# Altium PCB Glucometer-InstrumentationCircuit-1Cara.PcbDoc
Units mm, origin at the board's own origin, x right, y up, seen from the top; angles counter-clockwise.
Board outline 34.45 x 28.5 mm, 2 copper layers (Top Layer, Bottom Layer); 11 components, 11 nets, 47 pads, 0 vias.
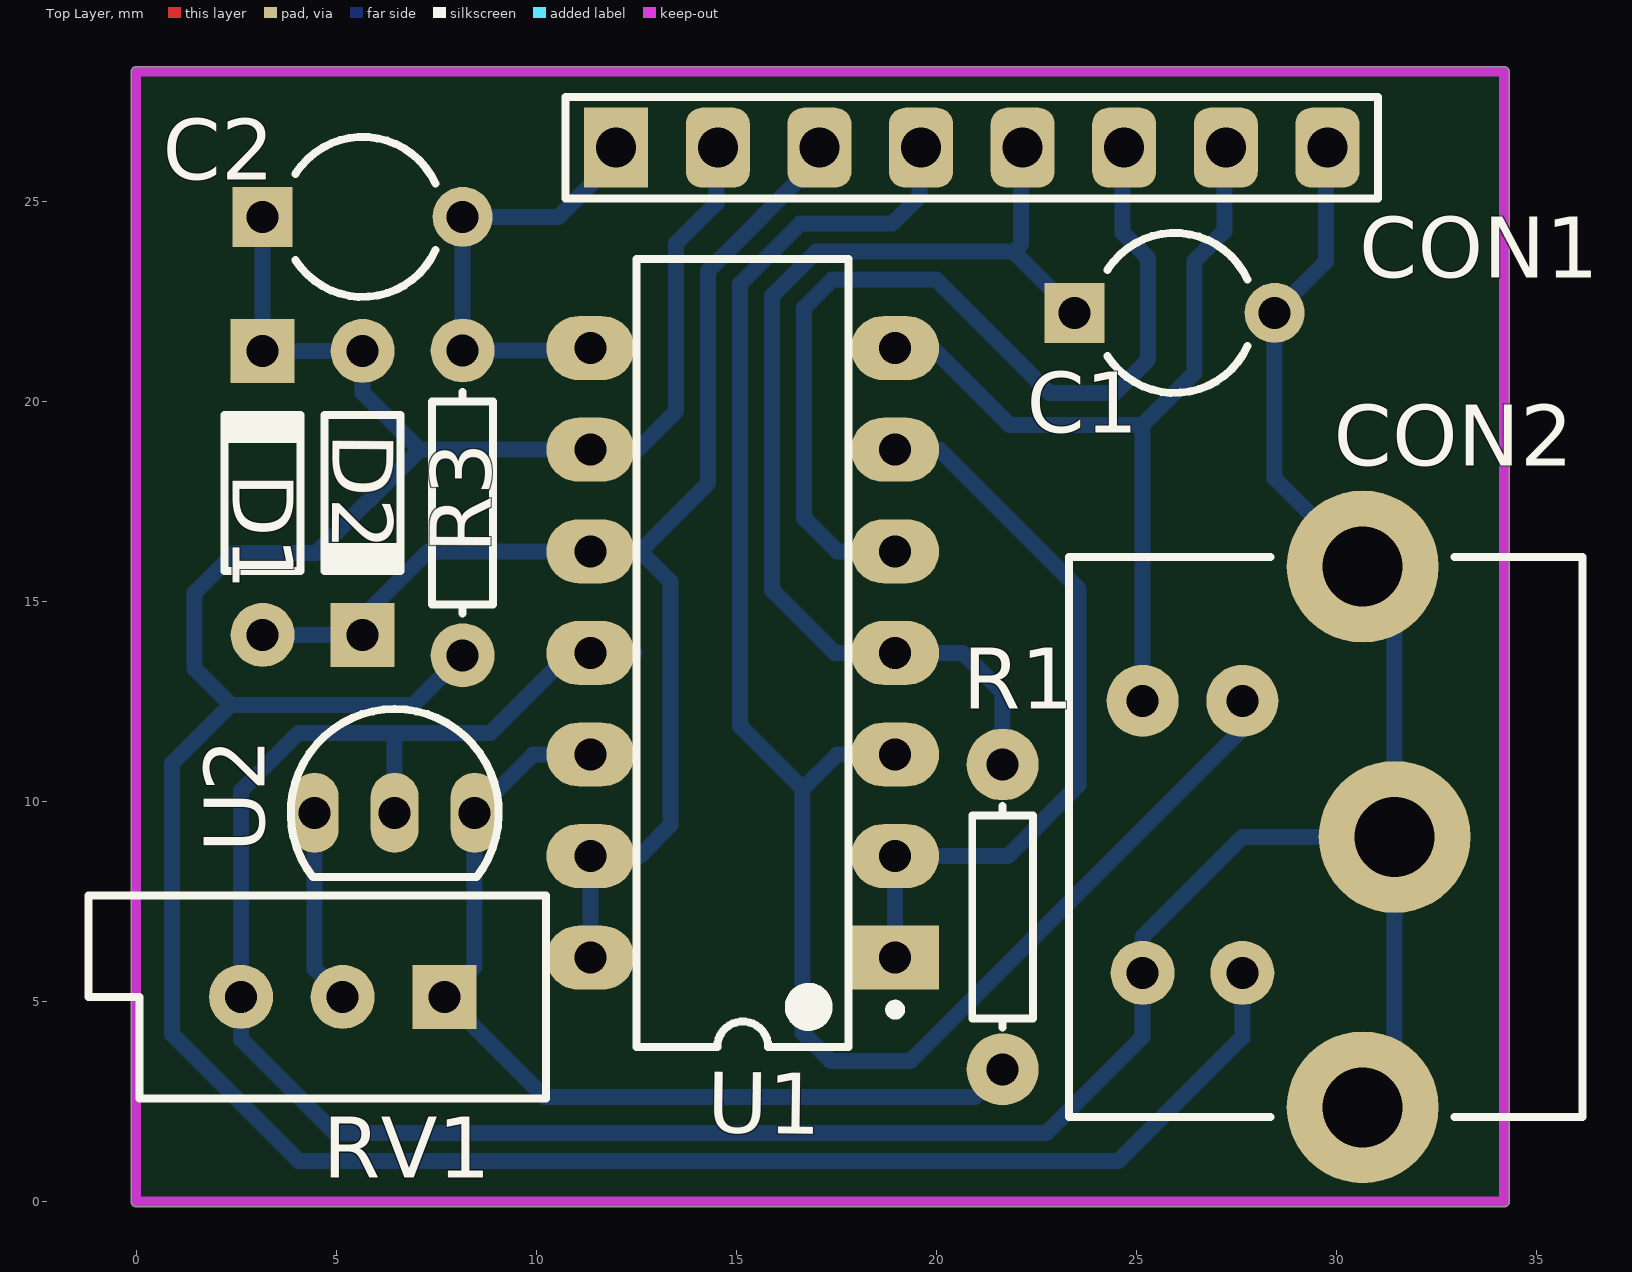
[diagram p0: Top Layer view]
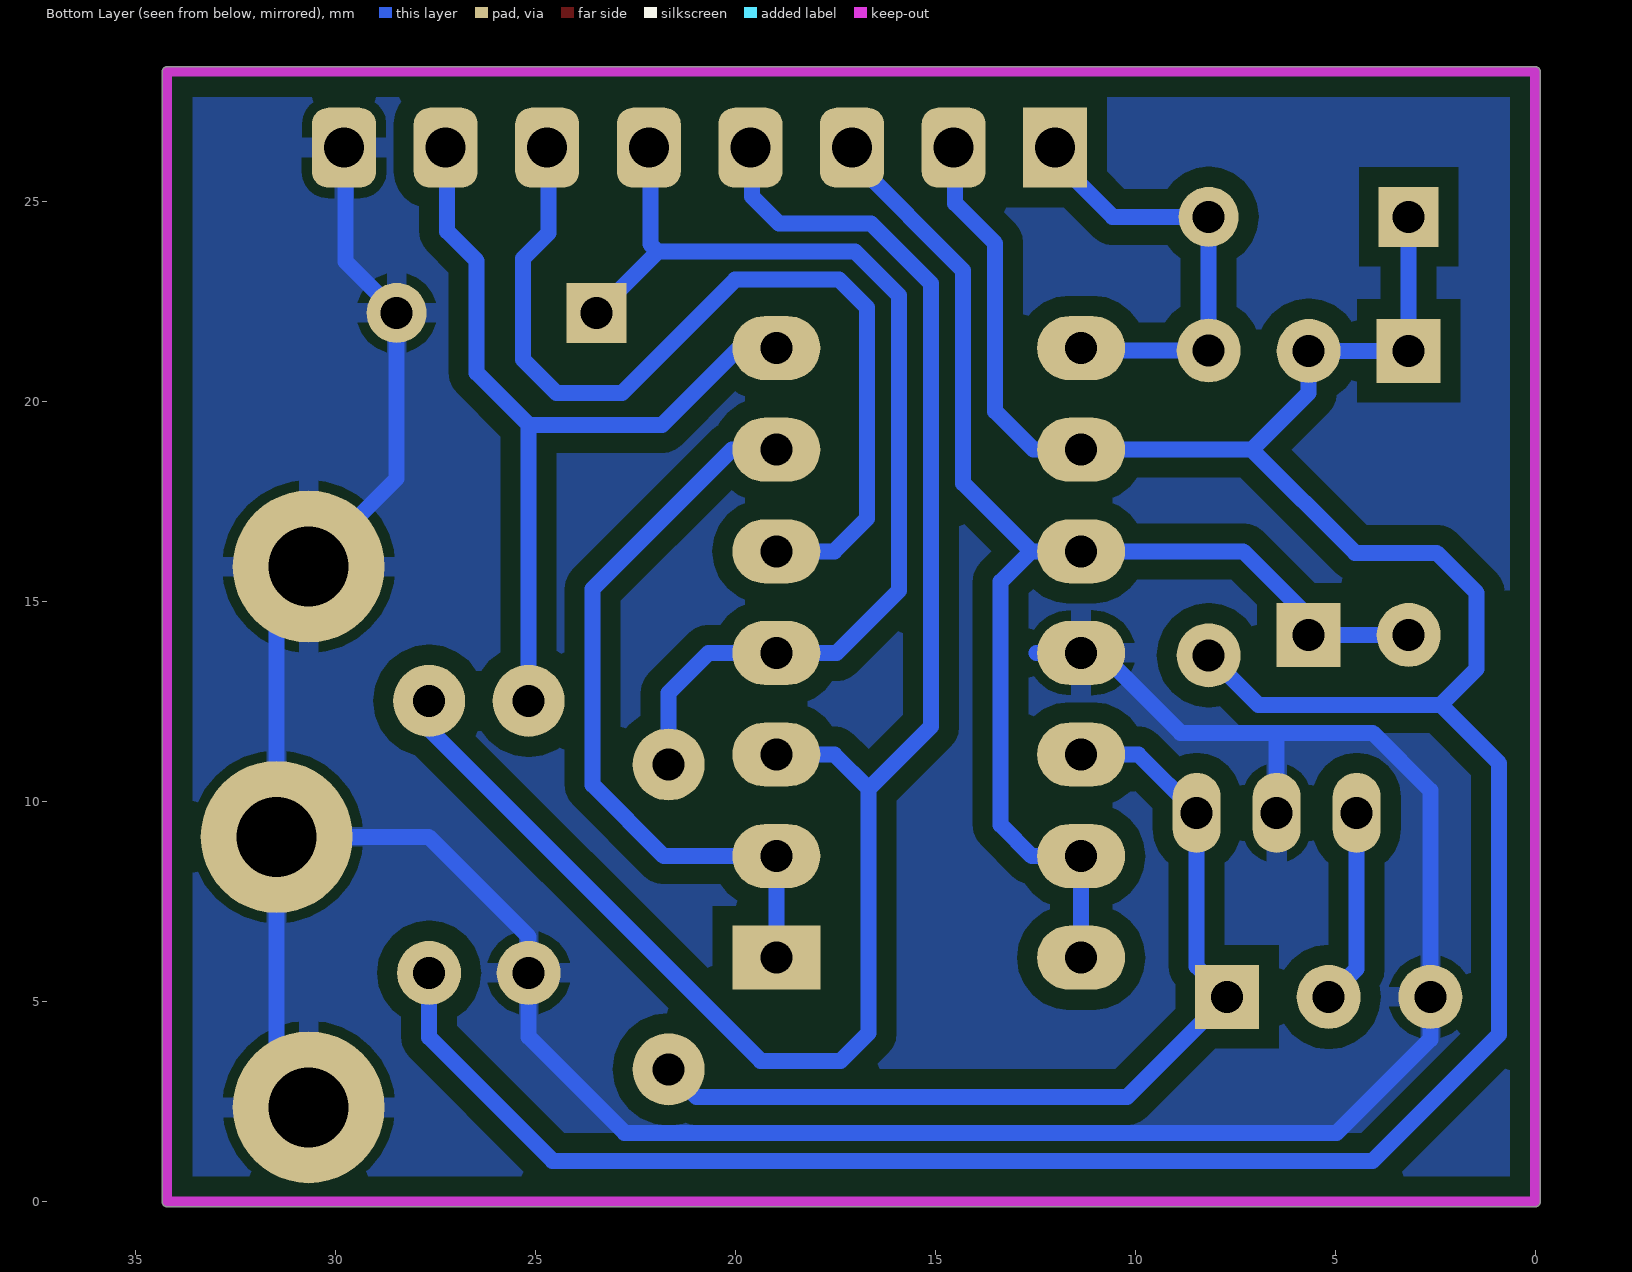
[diagram p1: Bottom Layer view, seen from below]

## Layer stack, top to bottom
Top Layer: signal copper 0.0356
Dielectric: dielectric 0.32, FR-4, Dk 4.8
Bottom Layer: signal copper 0.0356

## Board outline
-0.125,0 ccw(c0,0) 0,-0.125 34.2,-0.125 ccw(c34.2,0) 34.325,0 34.325,28.25 ccw(c34.2,28.25) 34.2,28.375 0,28.375 ccw(c0,28.25) -0.125,28.25

## Design rules (kind name [scope] priority, off if disabled: settings)
AssemblyTestPointUsage AssemblyTestPointUsage_1 [All] p2:
AssemblyTestpoint AssemblyTestpoint_1 [All] p2: testpointundercomponent=TRUE minsize=1.016 maxsize=2.54 preferedsize=1.524 minholesize=0 maxholesize=1.016 preferedholesize=0.813 testpointgrid=0.025 usegrid=TRUE gridtolerance=0 allowsidetop=TRUE allowsidebottom=TRUE
Clearance [All] p1: gap=0.3
ComponentClearance ComponentClearance_1 [All] p2: gap=0.254 collisioncheckmode=3 verticalgap=0.254 showdistances=FALSE
DiffPairsRouting DiffPairsRouting_1 [All] p2: maxlimit=0.254 minlimit=0.254 mostfreqgap=0.254 maxuncoupledlength=12.7
FabricationTestPointUsage TestPointUsage [All] p2: valid=0 allowmultiple=FALSE
FabricationTestpoint Testpoint [All] p2: side=3 testpointundercomponent=TRUE minsize=1.016 maxsize=2.54 preferedsize=1.524 minholesize=0 maxholesize=1.016 preferedholesize=0.813 testpointgrid=0.025 allowsidetop=TRUE allowsidebottom=TRUE usegrid=TRUE gridtolerance=0
FanoutControl Fanout_LCC [IsLCC] p1: bgadir=Out bgaviamode=Centered fanoutstyle=Auto fanoutdirection=Alternating viagrid=0.025 // Fanout_LCC (Default Rule)
FanoutControl Fanout_BGA [IsBGA] p2: bgadir=Out bgaviamode=Centered fanoutstyle=Auto fanoutdirection=Alternating viagrid=0.025 // Fanout_BGA (Default Rule)
FanoutControl Fanout_Default [All] p4: bgadir=Out bgaviamode=Centered fanoutstyle=Auto fanoutdirection=Alternating viagrid=0.025 // Fanout_Default (Default Rule)
FanoutControl Fanout_Small [(CompPinCount < 5)] p5: bgadir=Out bgaviamode=Centered fanoutstyle=Auto fanoutdirection=OutThenIn viagrid=0.025 // Fanout_Small (Default Rule)
FanoutControl Fanout_BGA_1 [IsBGA] p6: bgadir=Out bgaviamode=Centered fanoutstyle=Auto fanoutdirection=Alternating viagrid=0.025 // Fanout_BGA (Default Rule)
FanoutControl Fanout_LCC_1 [IsLCC] p7: bgadir=Out bgaviamode=Centered fanoutstyle=Auto fanoutdirection=Alternating viagrid=0.025 // Fanout_LCC (Default Rule)
FanoutControl Fanout_SOIC_1 [IsSOIC] p8: bgadir=Out bgaviamode=Centered fanoutstyle=Auto fanoutdirection=Alternating viagrid=0.025 // Fanout_SOIC (Default Rule)
FanoutControl Fanout_Small_1 [(CompPinCount < 5)] p9: bgadir=Out bgaviamode=Centered fanoutstyle=Auto fanoutdirection=OutThenIn viagrid=0.025 // Fanout_Small (Default Rule)
FanoutControl Fanout_Default_1 [All] p10: bgadir=Out bgaviamode=Centered fanoutstyle=Auto fanoutdirection=Alternating viagrid=0.025 // Fanout_Default (Default Rule)
Height Height_1 [All] p2: minheight=0 maxheight=25.4 prefheight=12.7
HoleSize HoleSize_1 [All] p2: absolutevalues=TRUE maxlimit=2.54 minlimit=0.025 maxpercent=80.000 minpercent=20.000
HoleToHoleClearance HoleToHoleClearance_1 [All] p2: gap=0.254 allowstackedmicrovias=TRUE
LayerPairs LayerPairs_1 [All] p2: enforce=TRUE
MinimumSolderMaskSliver MinimumSolderMaskSliver_1 [All] p2: minsoldermaskwidth=0.254
NetAntennae NetAntennae_1 [All] p2: netantennaetolerance=0
PasteMaskExpansion PasteMaskExpansion_1 [All] p2: expansion=0
PlaneClearance PlaneClearance_1 [All] p2: clearance=0.508
PolygonConnect [All] p1: connectstyle=Relief reliefconductorwidth=0.5 reliefentries=4 polygonreliefangle="90 Angle" airgapwidth=0.254
PolygonConnect PolygonConnect_1 [All] p2: connectstyle=Relief reliefconductorwidth=0.254 reliefentries=4 polygonreliefangle="90 Angle" airgapwidth=0.254
RoutingPriority RoutingPriority_1 [All] p2: routingpriority=0
RoutingTopology RoutingTopology_1 [All] p2: topology=Shortest
RoutingVias [All] p1: holewidth=0.6 width=1.6 viastyle="Through Hole" minholewidth=0.711 minwidth=1.27 maxholewidth=0.711 maxwidth=1.27
ShortCircuit ShortCircuit_1 [All] p2: allowed=FALSE
SilkToSilkClearance SilkToSilkClearance_1 [All] p2: silktosilkclearance=0.254
SilkToSolderMaskClearance SilkscreenOverComponentPads [IsPad] p1: minsilkscreentomaskgap=0.254 clearancetoexposedcopper=TRUE
SilkToSolderMaskClearance SilkscreenOverComponentPads_1 [IsPad] p2: minsilkscreentomaskgap=0.254 clearancetoexposedcopper=TRUE
SolderMaskExpansion [All] p1: expansion=0.102
SolderMaskExpansion SolderMaskExpansion_1 [All] p2: expansion=0.102
UnRoutedNet UnRoutedNet_1 [All] p2:
Width [All] p1: maxlimit=5 minlimit=0.25 preferedwidth=0.4 minimp=50.000000 maximp=50.000000 favimp=50.000000
23 further rules are at their usual default settings.

## Components (designator, comment, footprint, x,y, rotation, side; value= is the part's Value field where it differs from the comment)
C1 "Cap2" CAPR5-4X5 25.962,22.221 r0 top
C2 "Cap2" CAPR5-4X5 5.662,24.621 r0 top
CON1 "Header 8" HDR1X8 12,26.35 r0 top
CON2 "" CDIN2.6-3H4A 36.162,9.121 r180 top
D1 "1N4148" DO-35 3.163,17.721 r90 top
D2 "1N4148" DO-35 5.663,17.721 r270 top
R1 "Res1" AXIAL-0.3#1 21.662,7.121 r90 top
R3 "Res3" AXIAL-0.3#2 8.162,17.471 r90 top
RV1 "RPot" VR5 5.162,5.121 r180 top
U1 "LMC6044IN" N14A 15.162,13.721 r180 top
U2 "LM385Z" LP03 6.462,9.721 r270 top

## Footprints (in the part's own frame and the unit in brackets; to place one, negate y for a bottom-side part, rotate by r counter-clockwise, add the part's x,y. Pads: shape width x height; smd on the part's side, far side on the other; paste and mask are expansions set on the pad)
AXIAL-0.3#1 [mm] "Axial Device, Thru-Hole; 2 Leads; 0.3 in Pin Spacing"
  round 1.8 hole 0.8: 1(-3.81,0) 2(3.81,0)
  silkscreen extent -2.77,-0.76 2.77,0.76
AXIAL-0.3#2 [mm] "Axial Device, Thru-Hole; 2 Leads; 0.3 in Pin Spacing"
  round 1.6 hole 0.8: 1(-3.81,0) 2(3.81,0)
  silkscreen extent -2.77,-0.76 2.77,0.76
CAPR5-4X5 [mm] "Capacitor; 2 Leads"
  rect 1.5x1.5 hole 0.8: 1(-2.5,0)
  round 1.5 hole 0.8: 2(2.5,0)
  silkscreen extent -1.69,-2 1.82,2
CDIN2.6-3H4A [mm] "Connector; Circular DIN, Thru-Hole; 4 Position; Right Angle; Pitch 2.1/2.6 mm; Body 14 x 12.84 x 13 mm (WxTxH), Shielded, Special PCB Retention"
  round 1.8 hole 0.8: 1(8.51,-3.4) 3(11,-3.4)
  round 1.6 hole 0.8: 2(8.51,3.4) 4(11,3.4)
  round 3.8 hole 2: MH1(5.5,-6.76) MH2(4.7,0) MH3(5.5,6.76)
  silkscreen extent 0,-7 12.84,7, body extent 0,-7 12.84,7, height 13
DO-35 [mm] "Diode, Axial; Body 3.8 x 1.9 mm (LxDia. max), Lead Dia. 0.53 mm (max)"
  round 1.6 hole 0.8: 1(-3.55,0)
  rect 1.6x1.6 hole 0.8: 2(3.55,0)
  silkscreen extent -1.95,-0.95 2.05,0.95
HDR1X8 [mm] "Connector; Header; 8 Position"
  rect 1.6x2 hole 1: 1(0,0)
  rrect50% 1.6x2 hole 1: 2(2.54,0) 3(5.08,0) 4(7.62,0) 5(10.16,0) 6(12.7,0) 7(15.24,0) 8(17.78,0)
  silkscreen extent -1.27,-1.27 19.05,1.27
LP03 [mm] "TO, Flat Index; 3 In-Line, Axial Leads; Body Dia. 4.8mm; Leads 0.56 x 0.41 mm (max)"
  oval 2x1.2 hole 0.8: 1(0,-2) 2(0,0) 3(0,2)
  silkscreen extent -2.6,-2.6 1.6,2.6
N14A [mm] "DIP, 14-Leads, Row Spacing 7.62mm, Pitch 2.54mm, Body 19.56x6.35mm"
  rect 2.2x1.6 hole 0.8: 1(-3.81,7.62)
  oval 2.2x1.6 hole 0.8: 2(-3.81,5.08) 3(-3.81,2.54) 4(-3.81,0) 5(-3.81,-2.54) 6(-3.81,-5.08) 7(-3.81,-7.62) 8(3.81,-7.62) 9(3.81,-5.08) 10(3.81,-2.54) 11(3.81,0) 12(3.81,2.54) 13(3.81,5.08) 14(3.81,7.62)
  silkscreen extent -3.94,-9.85 2.65,9.85, body extent -3.55,-9.85 3.55,9.85, height 5.08
VR5 [mm] "Thru-Hole; 3 Leads"
  rect 1.6x1.6 hole 0.8: 1(-2.54,0)
  round 1.6 hole 0.8: 2(0,0) 3(2.54,0)
  silkscreen extent -5.08,-2.54 6.35,2.54

## Part data
C1 C2: "Capacitor"
CON1: "Header, 8-Pin"
CON2: library part "MiniDin 4Pins - SuperVideo", "MiniDin 4 Pins"
D1 D2: "High Conductance Fast Diode"
R1 R3: "Resistor"
RV1: "Potentiometer"
U1: "CMOS Quad Micropower Operational Amplifier, 14-pin MDIP"
U2: "Adjustable Micropower Voltage Reference, 3-pin TO-92"

## Nets (pads, with @x,y where several pads share a name; then routed paths per layer and width w, separated by ;. In a path a pad name is that pad's centre, name@x,y a point inside that pad or via, vN(x,y) a via of type N, cw(c..) or ccw(c..) an arc to the next point about the centre after c; other vN are vias at no path point)
GND: C1.2 CON1.8 CON2.4 CON2.MH1 CON2.MH2 CON2.MH3 RV1.3 U1.11 U2.2 | length 79.6
  Bottom Layer w0.4: U2.2 6.462,11.721 ; 12.463,13.721 U1.11 10.863,13.721 8.862,11.721 6.462,11.721 ; CON1.8@29.742,26.021 29.742,23.501 C1.2 28.462,18.081 CON2.MH1 31.462,15.081 CON2.MH2 ; CON2.MH3 31.462,3.161 CON2.MH2 ; 6.462,11.721 4.062,11.721 2.622,10.281 2.622,4.061 4.962,1.721 22.762,1.721 25.162,4.121 CON2.4 25.162,6.621 27.662,9.121 CON2.MH2
NetC2_1: C2.1 CON1.2 CON2.2 D1.2 D2.1 R3.1 U1.9 | length 79.4
  Bottom Layer w0.4: C2.1 D1.2 D2.1 5.663,20.221 7.082,18.801 ; R3.1 6.922,12.421 2.362,12.421 ; CON1.2@14.502,26.021 14.502,24.961 13.5,23.958 13.5,19.758 12.542,18.801 U1.9 7.082,18.801 ; CON2.2@27.652,5.111 CON2.2 27.652,4.111 24.562,1.021 4.063,1.021 0.9,4.183 0.9,10.958 2.362,12.421 ; 2.362,12.421 1.462,13.321 1.462,15.221 2.462,16.221 4.502,16.221 7.082,18.801
NetC2_2: C2.2 CON1.1 R3.2 U1.8 | length 10.8
  Bottom Layer w0.4: U1.8@11.292,21.281 R3.2 C2.2 10.562,24.621 CON1.1@11.962,26.021
NetCON1_4: CON1.4 CON2.1 U1.3 | length 43.7
  Bottom Layer w0.4: U1.3 17.523,11.181 16.662,10.321 ; CON1.4@19.582,26.021 19.582,25.132 18.9,24.45 16.6,24.45 15.1,22.95 15.1,11.883 16.662,10.321 ; CON2.1 27.652,11.811 19.362,3.521 17.363,3.521 16.662,4.221 16.662,10.321
NetCON1_6: CON1.6 U1.5 | length 23.5
  Bottom Layer w0.4: U1.5 17.522,16.261 16.7,17.083 16.7,22.35 17.4,23.05 20,23.05 22.829,20.221 24.471,20.221 25.3,21.05 25.3,23.583 24.662,24.221 CON1.6@24.662,26.021
NetCON1_7: CON1.7 CON2.3 U1.7 | length 21.3
  Bottom Layer w0.4: U1.7 19.909,21.341 21.829,19.421 25.162,19.421 ; CON2.3 25.162,19.421 ; CON1.7@27.202,26.021 27.202,24.261 26.462,23.521 26.462,20.721 25.162,19.421
NetR1_1: R1.1 RV1.1 U1.12 U2.3 | length 23.7
  Bottom Layer w0.4: U1.12 9.923,11.181 U2.3 8.463,5.881 RV1.1 10.202,2.621 20.973,2.621 R1.1
NetRV1_3: RV1.2 U2.1 | length 4.9
  Bottom Layer w0.4: U2.1 4.462,5.821 RV1.2
NetU1_1: U1.1 U1.2 U1.6 | length 18.8
  Bottom Layer w0.4: U1.1 U1.2 21.782,8.641 23.562,10.421 23.562,15.321 20.082,18.801 U1.6
VCC: C1.1 CON1.5 R1.2 U1.4 | length 27
  Bottom Layer w0.4: R1.2 21.662,12.721 20.662,13.721 U1.4 17.462,13.721 15.9,15.283 15.9,22.65 17,23.75 21.933,23.75 ; CON1.5@22.122,26.021 22.122,23.939 21.933,23.75 ; C1.1 21.933,23.75
VGND: CON1.3 D1.1 D2.2 U1.10 U1.13 U1.14 | length 34.2
  Bottom Layer w0.4: D1.1 D2.2 ; D2.2@5.663,14.621 7.303,16.261 U1.10 12.603,16.261 ; U1.14 U1.13 12.583,8.641 13.362,9.421 13.362,15.501 12.603,16.261 ; CON1.3@17.042,26.021 14.3,23.278 14.3,17.958 12.603,16.261
  Bottom Layer w0.5: D2.2 D2.2@5.663,14.621

## Polygon pours and split planes (outlines as drawn)
GND on Bottom Layer "Bottom Layer-No Net" (solid, pour order 3): 0.6,28.25 33.6,28.25 33.6,0 0.6,0

## Keep-outs
Keep-Out Layer:
  lines w0.25: 0,0 0,28.25 34.2,28.25 34.2,0 0,0

## Silkscreen, mask and mechanical layers (free items; w line width, h text height)
Mechanical 16:
  lines w0.127: -150.333,-29.054 -145.253,-29.054 ; -150.333,24.921 -145.253,24.921 ; -150.333,78.896 -145.253,78.896 ; -80.483,-83.029 -80.483,-77.949 ; -80.483,127.791 -80.483,132.871 ; -10.633,-83.029 -10.633,-77.949 ; -10.633,127.791 -10.633,132.871 ; 59.217,-83.029 59.217,-77.949 ; 59.217,127.791 59.217,132.871 ; 123.987,-29.054 129.067,-29.054 ; 123.987,24.921 129.067,24.921 ; 123.987,78.896 129.067,78.896 ; -150.333,-83.029 -150.333,132.871 129.067,132.871 129.067,-83.029 -150.333,-83.029 ; -145.253,-77.949 123.987,-77.949 123.987,127.791 -145.253,127.791 -145.253,-77.949
  text "1" at -116.009,129.442 h1.78
  text "2" at -46.142,129.442 h1.78
  text "3" at 23.581,129.442 h1.78
  text "4" at 93.457,129.442 h1.78
  text "A" at -148.428,103.585 h1.78
  text "A" at 125.892,103.585 h1.78
  text "B" at -148.428,49.61 h1.78
  text "B" at 125.892,49.61 h1.78
  text "C" at -148.428,-4.365 h1.78
  text "C" at 125.892,-4.365 h1.78
  text "D" at -148.428,-58.213 h1.78
  text "D" at 125.892,-58.213 h1.78
  text "1" at -116.009,-81.378 h1.78
  text "2" at -46.142,-81.378 h1.78
  text "3" at 23.581,-81.378 h1.78
  text "4" at 93.457,-81.378 h1.78

## Text inside footprints (layer, text, board x,y; h text height)
CON2: Mechanical 1 "PCB Edge" at 35.562,15.821 h0.25 r270